# Altium PCB sd_card_module.PcbDoc
Units mm, origin at the board's own origin, x right, y up, seen from the top; angles counter-clockwise.
Board outline 23.02 x 15.02 mm, 4 copper layers (Component Side, Signal Layer 2, Signal Layer 1, Solder Side), stack 0.728 mm thick; 26 components, 39 nets, 222 pads, 58 vias.
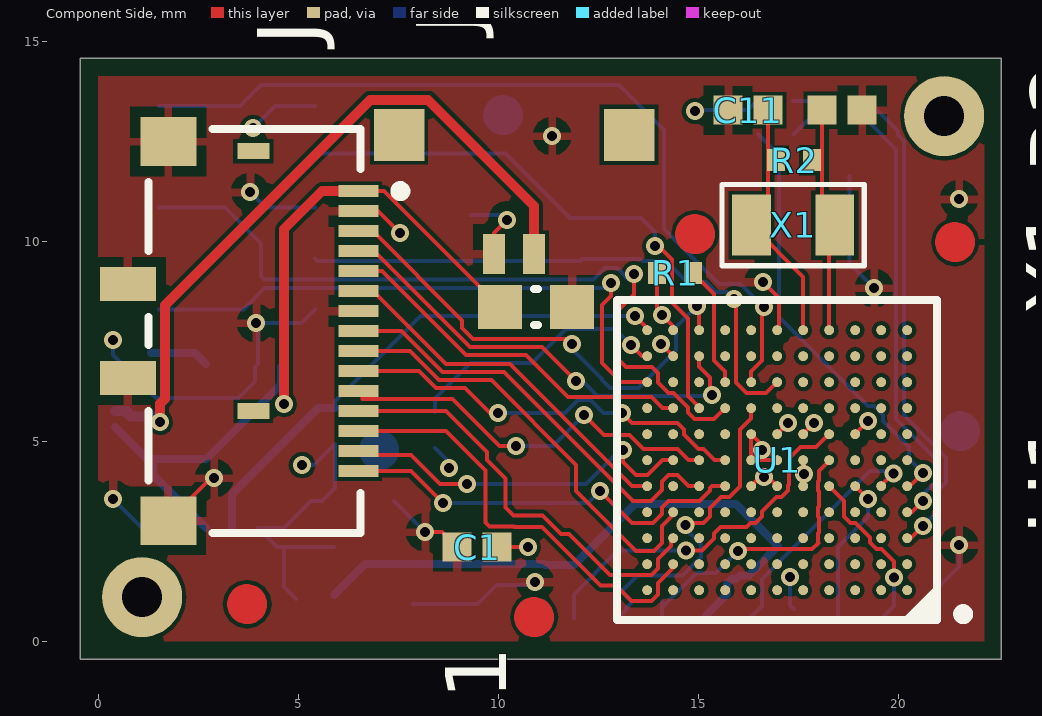
[diagram p0: Component Side view]
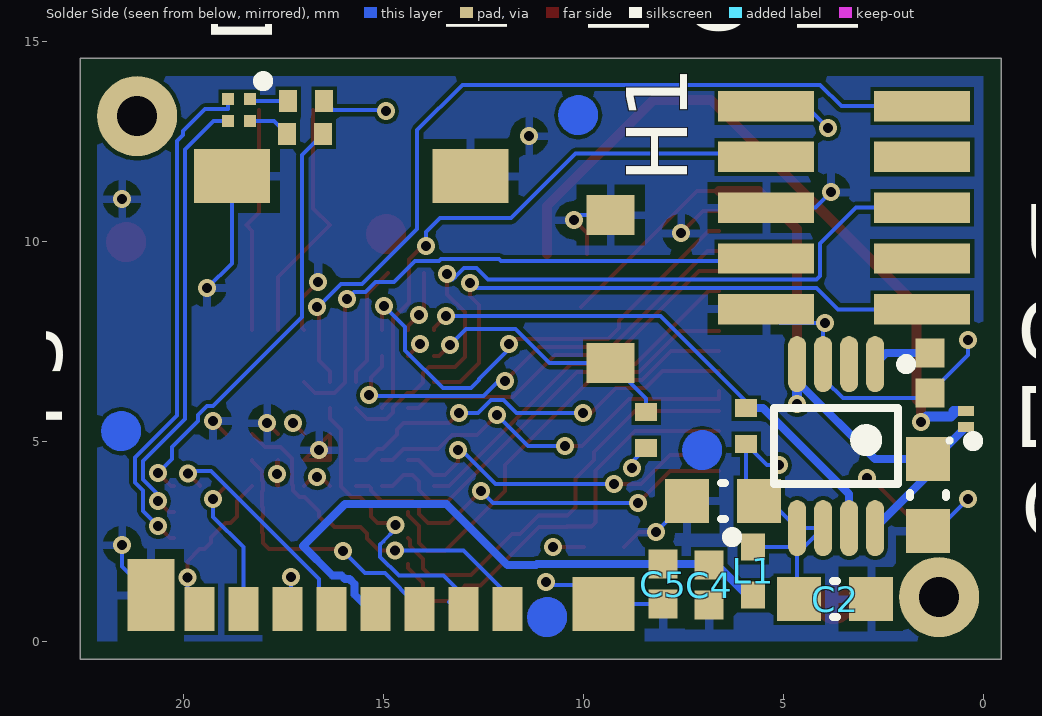
[diagram p1: Solder Side view, seen from below]
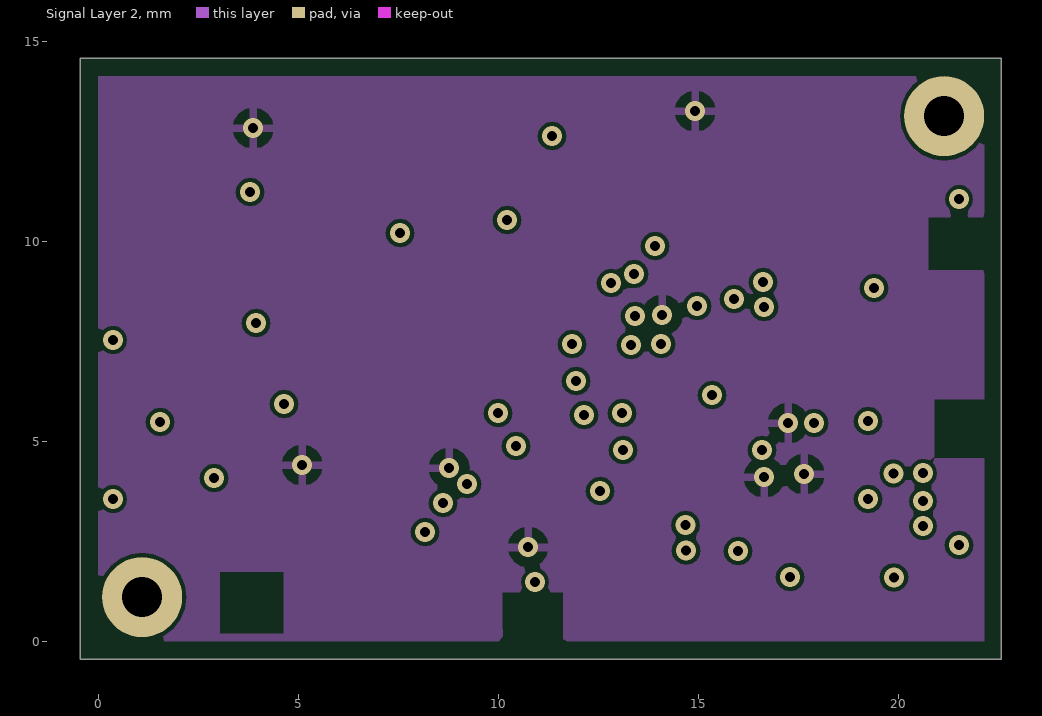
[diagram p2: Signal Layer 2]
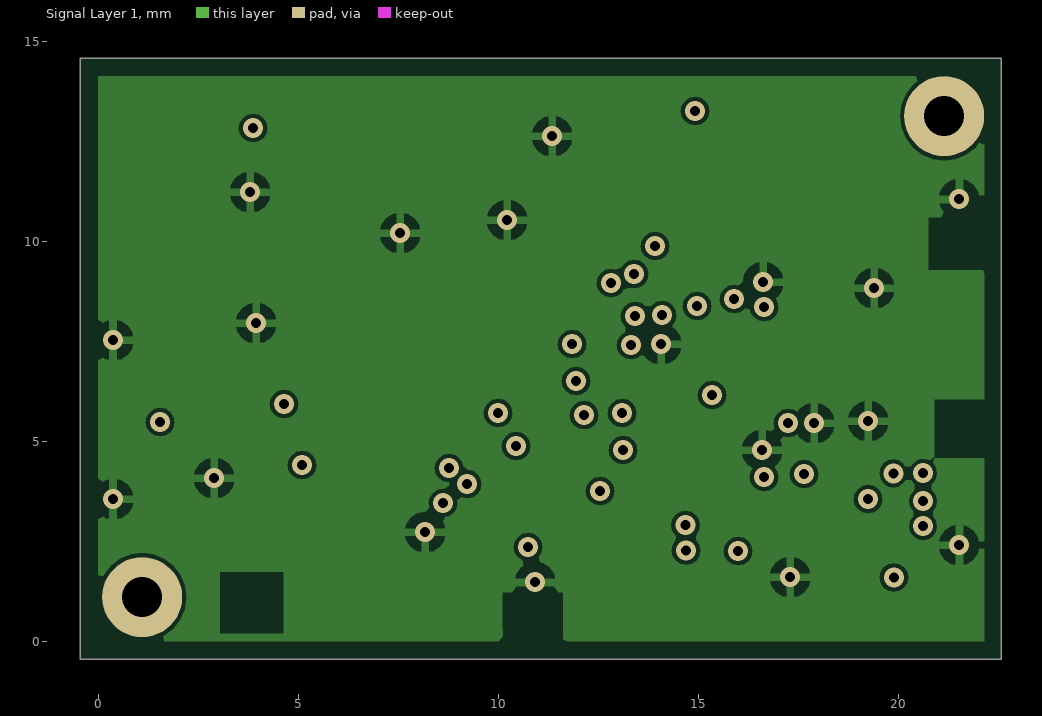
[diagram p3: Signal Layer 1]

## Layer stack, top to bottom
Top Solder: solder mask 0.0102, Solder Resist, Dk 3.5
Component Side: signal copper 0.012
Dielectric 1: core 0.28, Prepreg 7628, Dk 4.2
Signal Layer 2: signal copper 0.018
Dielectric 3: prepreg 0.36, FR4, Dk 4.2
Signal Layer 1: signal copper 0.018
Dielectric 4: core 0.028, Prepreg 7628, Dk 4.2
Solder Side: signal copper 0.012
Bottom Solder: solder mask 0.0102, Solder Resist, Dk 3.5

## Board outline
-0.45,-0.45 -0.45,14.575 22.575,14.575 22.575,-0.45

## Design rules (kind name [scope] priority, off if disabled: settings)
Clearance Clearance-xPP-xTP-xTT [All] p1: gap=0.1
ComponentClearance [All] p1: gap=0.25 collisioncheckmode=3 verticalgap=0.25 showdistances=FALSE
DiffPairsRouting [All] p1: maxlimit=0.25 minlimit=0.25 mostfreqgap=0.25 toplayer_minwidth=0.381 toplayer_maxwidth=0.381 toplayer_prefwidth=0.381 midlayer1_minwidth=0.381 midlayer1_maxwidth=0.381 midlayer1_prefwidth=0.381 midlayer2_minwidth=0.381 midlayer2_maxwidth=0.381 midlayer2_prefwidth=0.381 bottomlayer_minwidth=0.381 bottomlayer_maxwidth=0.381 bottomlayer_prefwidth=0.381 maxuncoupledlength=12.5
Height [All] p1: minheight=0 maxheight=25 prefheight=12.5
HoleSize HoleSize-PTH [All] p1: absolutevalues=TRUE maxlimit=2 minlimit=0.15 maxpercent=80.000 minpercent=20.000
HoleToHoleClearance [All] p1: gap=0.15 allowstackedmicrovias=TRUE
MinimumAnnularRing "Minimum IAR  >0.45mm" [((ObjectKind = 'Pad') OR (ObjectKind = 'Via')) And (Layer = 'MultiLayer') And (HoleDiameter > AsMM(0.45))] p1: minimumring=0.125 // minimum inner annular ring for pads > 0.45mm finished hole size
MinimumAnnularRing "Minimum IAR <0.45mm" [((ObjectKind = 'Pad') OR (ObjectKind = 'Via')) And ((Layer = 'Component Side') OR (Layer = 'Solder Side')) And (HoleDiameter < AsMM(0.45))] p2: minimumring=0.125 // minimum outer annular ring for pads < 0.45mm finished hole size
MinimumAnnularRing "Minimum IAR <0.5mm_1" [((ObjectKind = 'Pad') OR (ObjectKind = 'Via')) And ((Layer = 'Signal Layer 1') OR (Layer = 'Signal Layer 2')) And (HoleDiameter < AsMM(0.5))] p3: minimumring=0.125 // minimum inner  annular ring for pads < 0.5mm finished hole size
MinimumSolderMaskSliver [All] p1: minsoldermaskwidth=0.1
PlaneClearance PlaneClearance-IPI [All] p1: clearance=0.4
PlaneConnect [All] p1: planeconnectstyle=Relief reliefexpansion=0.4 reliefentries=4 reliefconductorwidth=0.2 reliefairgap=0.2
PolygonConnect PolygonConnect-xTW [All] p1: connectstyle=Relief reliefconductorwidth=0.2 reliefentries=4 polygonreliefangle="90 Angle" airgapwidth=0.254
RoutingCorners [All] p1: cornerstyle=45-Degree minsetback=2.5 maxsetback=2.5
RoutingVias "RoutingVias > 0.45mm" [(ObjectKind = 'Via') And (HoleDiameter > AsMM(0.45))] p1: holewidth=0.5 width=1 viastyle="Through Hole" minholewidth=0.45 minwidth=0.95 maxholewidth=0.9 maxwidth=1.4 // finishet hole size > 0.45mm
RoutingVias "RoutingVias <= 0.45mm" [(ObjectKind = 'Via') And (HoleDiameter <= AsMM(0.45))] p2: holewidth=0.25 width=0.8 viastyle="Through Hole" minholewidth=0.25 minwidth=0.45 maxholewidth=0.5 maxwidth=1 // finishet hole size <= 0.45mm
SilkToBoardRegionClearance [All] p1 off:
SilkToSilkClearance [All] p1 off: silktosilkclearance=0.2
SilkToSolderMaskClearance SilkscreenOverComponentPads [IsPad] p1 off: minsilkscreentomaskgap=0.2 clearancetoexposedcopper=TRUE
SolderMaskExpansion [All] p1: expansion=0
Width Width-xTW [All] p1: maxlimit=1.5 minlimit=0.1 preferedwidth=0.2
18 further rules are at their usual default settings.

## Classes and differential pairs
component class sd_card_module: C2 C3 C4 C5 C6 C10 C13 D1 D4 J1 J2 L1 P3 R3 R4 R5 R6 U3
component class U_K64f_XFBGA_121_pin: C1 C11 C12 H1 R1 R2 U1 X1

## Components (designator, comment, footprint, x,y, rotation, side; value= is the part's Value field where it differs from the comment)
C1 "CAP 0.1uF 10V 0402(1005)" CAPC0402(1005)60_M 9.475,2.35 r0 top
C2 "CAP 47uF 10V 0603(1608)" CAPC0603(1608)100_M 3.7,1.05 r0 bottom
C3 "CAP 10pF 10V 0402(1005)" CAPC0402(1005)60_M 1.325,6.7 r90 bottom
C4 "CAP 0.1uF 10V 0402(1005)" CAPC0402(1005)60_M 6.85,1.4 r90 bottom
C5 "CAP 1uF 10V 0402(1005)" CAPC0402(1005)60_M 8,1.425 r90 bottom
C6 "CAP 2.2uF 10V 0603(1608)" CAPC0603(1608)100_M 10.95,8.35 r180 top
C10 "CAP 2.2uF 10V 0603(1608)" CAPC0603(1608)100_M 6.5,3.5 r180 bottom
C11 "12p" CAPC0402(1005)60_M 16.25,13.275 r0 top
C12 "12p" CAPC0402(1005)60_M 18.6,13.275 r180 top
C13 "CAP 2.2uF 10V 0603(1608)" CAPC0603(1608)100_M 1.375,3.65 r90 bottom
D1 "0603 diode" DIOC0603X03N 0.425,5.55 r90 bottom
D4 "3 in 1 led APGF1011SEEPBVGC-TT" APGF1011SEEPBVGC-TT 18.325,13.55 r270 bottom
H1 "10 pin header" SAM8795-ND 5.425,13.375 r270 bottom (schematic designator H)
J1 "502244-1530" "MOLX-502244-1530 long_pins" 3.675,7.75 r270 top
J2 "2 pin header smd" "2 pin header picolock" 9.9,9.675 r0 top
L1 "MMZ1005Y800BT000" SMD-0402 5.75,1.75 r270 bottom
P3 "microsd molex 104031" "MICROSD 104031 molex" 15.05,0.25 r180 bottom
R1 "4K7 5% 0402(1005)" RESC0402(1005)_L 14.425,9.2 r0 top
R2 "1M" RESC0402(1005)_L 17.4,12.025 r0 top
R3 "470R 5% 0402(1005)" RESC0402(1005)_L 16.95,12.675 r180 bottom
R4 "330k 5% 0402(1005)" RESC0402(1005)_L 5.925,5.375 r90 bottom
R5 "270R 5% 0402(1005)" RESC0402(1005)_L 16.925,13.5 r0 bottom
R6 "10M 5% 0402(1005)" RESC0402(1005)_L 8.425,5.275 r90 bottom
U1 "MK64FN1M0VDC12" FRES-MAPBGA-121 16.975,4.525 r180 top
U3 "LP2989IMM-3.3" MUA08A_L 3.675,4.875 r270 bottom
X1 "ABS06-32.768KHz-T" 0805 17.375,10.4 r0 top

## Footprints (in the part's own frame and the unit in brackets; to place one, negate y for a bottom-side part, rotate by r counter-clockwise, add the part's x,y. Pads: shape width x height; smd on the part's side, far side on the other; paste and mask are expansions set on the pad)
"2 pin header picolock" [mm] "2 pin header picolock"
  rect 1.26x1.3 smd: Mount(-2.375,2.98) Mount(3.375,2.98)
  rect 0.55x1 smd: VDD(1,0) VSS(0,0)
  body extent -2.77,-0.39 3.83,4.8, height 1.48
0805 [mil]
  rect 38x60 smd: 1(-41,0) 2(41,0)
  silkscreen extent -70,-40 70,40
APGF1011SEEPBVGC-TT [mm] "APGF1011SEEPBVGC-TT 3 in 1 led"
  rect 0.3x0.3 smd: 1(0,0) 2(0,-0.55) 3(0.55,-0.55) 4(0.55,0)
  body extent -0.23,-0.77 0.77,0.23, height 0.2
CAPC0402(1005)60_M [mm] "Chip Capacitor, Body 1.0x0.5mm, Height 0.6mm, IPC Low Density"
  rect 0.72x0.72 smd: 1(-0.5,0) 2(0.5,0)
  body extent -0.55,-0.3 0.55,0.3, height 0.6
CAPC0603(1608)100_M [mm] "Chip Capacitor, Body 1.6x0.8mm, Height 1.0mm, IPC Low Density"
  rect 1.1x1.1 smd: 1(-0.9,0) 2(0.9,0)
  silkscreen extent -0.05,-0.45 0.05,0.45, body extent -0.87,-0.47 0.88,0.48, height 1
DIOC0603X03N [mm] "Chip Diode, 2-Leads, Body 0.60x0.30mm, IPC Medium Density"
  rect 0.25x0.4 smd: 1(-0.2,0) 2(0.2,0)
  silkscreen extent -0.59,0.36 -0.49,0.46, body extent -0.32,-0.17 0.32,0.16, height 0.32
FRES-MAPBGA-121 [mm] "MAPBGA, 121-Balls, Body 8x8mm, Pitch 0.65mm"
  round 0.25 smd: A1(-3.25,3.25) A2(-2.6,3.25) A3(-1.95,3.25) A4(-1.3,3.25) A5(-0.65,3.25) A6(0,3.25) A7(0.65,3.25) A8(1.3,3.25) A9(1.95,3.25) A10(2.6,3.25) A11(3.25,3.25) B1(-3.25,2.6) B2(-2.6,2.6) B3(-1.95,2.6) B4(-1.3,2.6) B5(-0.65,2.6) B6(0,2.6) B7(0.65,2.6) B8(1.3,2.6) B9(1.95,2.6) B10(2.6,2.6) B11(3.25,2.6) C1(-3.25,1.95) C2(-2.6,1.95) C3(-1.95,1.95) C4(-1.3,1.95) C5(-0.65,1.95) C6(0,1.95) C7(0.65,1.95) C8(1.3,1.95) C9(1.95,1.95) C10(2.6,1.95) C11(3.25,1.95) D1(-3.25,1.3) D2(-2.6,1.3) D3(-1.95,1.3) D4(-1.3,1.3) D5(-0.65,1.3) D6(0,1.3) D7(0.65,1.3) D8(1.3,1.3) D9(1.95,1.3) D10(2.6,1.3) D11(3.25,1.3) E1(-3.25,0.65) E2(-2.6,0.65) E3(-1.95,0.65) E4(-1.3,0.65) E5(-0.65,0.65) E6(0,0.65) E7(0.65,0.65) E8(1.3,0.65) E9(1.95,0.65) E10(2.6,0.65) E11(3.25,0.65) F1(-3.25,0) F2(-2.6,0) F3(-1.95,0) F4(-1.3,0) F5(-0.65,0) F6(0,0) F7(0.65,0) F8(1.3,0) F9(1.95,0) F10(2.6,0) F11(3.25,0) G1(-3.25,-0.65) G2(-2.6,-0.65) G3(-1.95,-0.65) G4(-1.3,-0.65) G5(-0.65,-0.65) G6(0,-0.65) G7(0.65,-0.65) G8(1.3,-0.65) G9(1.95,-0.65) G10(2.6,-0.65) G11(3.25,-0.65) H1(-3.25,-1.3) H2(-2.6,-1.3) H3(-1.95,-1.3) H4(-1.3,-1.3) H5(-0.65,-1.3) H6(0,-1.3) H7(0.65,-1.3) H8(1.3,-1.3) H9(1.95,-1.3) H10(2.6,-1.3) H11(3.25,-1.3) J1(-3.25,-1.95) J2(-2.6,-1.95) J3(-1.95,-1.95) J4(-1.3,-1.95) J5(-0.65,-1.95) J6(0,-1.95) J7(0.65,-1.95) J8(1.3,-1.95) J9(1.95,-1.95) J10(2.6,-1.95) J11(3.25,-1.95) K1(-3.25,-2.6) K2(-2.6,-2.6) K3(-1.95,-2.6) K4(-1.3,-2.6) K5(-0.65,-2.6) K6(0,-2.6) K7(0.65,-2.6) K8(1.3,-2.6) K9(1.95,-2.6) K10(2.6,-2.6) K11(3.25,-2.6) L1(-3.25,-3.25) L2(-2.6,-3.25) L3(-1.95,-3.25) L4(-1.3,-3.25) L5(-0.65,-3.25) L6(0,-3.25) L7(0.65,-3.25) L8(1.3,-3.25) L9(1.95,-3.25) L10(2.6,-3.25) L11(3.25,-3.25)
  silkscreen extent -4.78,-4 4,4, body extent -4,-4 4,4, height 0.5
"MICROSD 104031 molex" [mm]
  rect 0.75x1.1 smd: 1(3.155,0.55) 2(2.055,0.55) 3(0.955,0.55) 4(-0.145,0.55) 5(-1.245,0.55) 6(-2.345,0.55) 7(-3.445,0.55) 8(-4.545,0.55)
  rect 1.2x1 smd: detect1(5.74,6.7) detect2(5.74,10.4)
  rect 1.17x1.8 smd: shield(-5.755,0.9)
  rect 1.9x1.35 smd: shield(-3.73,11.375) shield(2.24,11.375)
  rect 1.55x1.35 smd: shield(5.565,0.675)
  body extent -5.95,0.35 6,11.75, height 1.44
"MOLX-502244-1530 long_pins" [mm] "FFC Connector, 15-Leads, Right Angle, Pitch 0.5 mm, Mated Height 2.33 mm, SMT"
  rect 0.3x1 smd: 1(-3.5,2.83) 2(-3,2.83) 3(-2.5,2.83) 4(-2,2.83) 5(-1.5,2.83) 6(-1,2.83) 7(-0.5,2.83) 8(0,2.83) 9(0.5,2.83) 10(1,2.83) 11(1.5,2.83) 12(2,2.83) 13(2.5,2.83) 14(3,2.83) 15(3.5,2.83)
  rect 1.22x1.4 smd: MP1(-4.74,-1.92) MP2(4.74,-1.92)
  rect 0.85x1.4 smd: MP3(-1.175,-2.93) MP4(1.175,-2.93)
  silkscreen extent -5.05,-2.42 5.05,4.01, body extent -5.05,-3.28 5.05,3.18, height 2.34
MUA08A_L [mm] "TSOP, 8-Leads, Body 3x3mm, Pitch 0.65mm, IPC High Density"
  oval 1.4x0.45 smd: 1(-2.05,0.975) 2(-2.05,0.325) 3(-2.05,-0.325) 4(-2.05,-0.975) 5(2.05,-0.975) 6(2.05,-0.325) 7(2.05,0.325) 8(2.05,0.975)
  silkscreen extent -2.17,-1.55 0.95,1.87, body extent -1.55,-1.55 1.55,1.55, height 1.09
RESC0402(1005)_L [mm] "Chip Resistor, Body 1.0x0.5mm, IPC High Density"
  rect 0.45x0.55 smd: 1(-0.45,0) 2(0.45,0)
  body extent -0.52,-0.27 0.53,0.28, height 0.4
SAM8795-ND [mm] "10 pin programming header 1.27mm"
  rect 0.76x2.4 smd: 1(0,0) 2(1.27,0) 3(2.54,0) 4(3.81,0) 5(5.08,0) 6(0,3.9) 7(1.27,3.9) 8(2.54,3.9) 9(3.81,3.9) 10(5.08,3.9)
SMD-0402 [mm] "Chip Inductor, 2-Leads, Body 1.0x0.5mm"
  rect 0.675x0.6 smd: 1(-0.6,0) 2(0.6,0)
  body extent -0.5,-0.25 0.5,0.25, height 0.49

## Part data
C1: library part CMP-1034-00013-1, "0.1uF"
C2: library part CMP-1035-00147-1, "CAP 47uF 10V ±0.1pF 0603 (1608 Metric) Thickness 1mm SMD"
C3: library part CMP-1034-00013-1, "CAP 10pF 10V ±0.1pF 0402 (1005 Metric) Thickness 0.6mm SMD"
C4: library part CMP-1034-00013-1, "CAP 0.5pF 10V ±0.1uF 0402 (1005 Metric) Thickness 0.6mm SMD"
C5: library part CMP-1034-00013-1, "CAP 1uF 10V ±1uF 0402 (1005 Metric) Thickness 0.6mm SMD"
C6 C10 C13: library part CMP-1035-00147-1, "CAP 2.2uF 10V ±0.1pF 0603 (1608 Metric) Thickness 1mm SMD"
C11 C12: library part CMP-1034-00013-1, "CAP 12pF 10V ±0.1pF 0402 (1005 Metric) Thickness 0.6mm SMD"
H1: library part SAM8795-ND, "10 pin programming header SAM8795-ND"
J1: library part MOLX-502244-1530
L1: library part CMP-0220-00098-1, "EMI Filter Beads, Chips & Arrays 0402 80ohms 250mA HiSpd Signal Line"
R1: library part CMP-1011-00090-1, "4K7 0.063W 5% 0402 (1005 Metric)  SMD"
R2: library part CMP-1011-00090-1, "1M 0.063W 5% 0402 (1005 Metric)  SMD"
R3: library part CMP-1011-00090-1, "470R 5% 0402 (1005 Metric)  SMD"
R4: library part CMP-1011-00090-1, "330k 0.063W 5% 0402 (1005 Metric)  SMD"
R5: library part CMP-1011-00090-1, "270R W 5% 0402 (1005 Metric)  SMD"
R6: library part CMP-1011-00090-1, "10M 0.063W 5% 0402 (1005 Metric)  SMD"
U1: library part CMP-0182-00050-2, "Cortex-M4-based Microcontroller with FPU, 1 MB, 120 MHz, 1.71 to 3.6 V, -40 to 105 degC, 121-Ball MAPBGA, RoHS, Tray"
U3: library part CMP-0062-02283-2, "Micropower/Low Noise, 500 mA Ultra Low-Dropout Regulator, 8-pin Mini SOIC"
X1: library part CMP-0463-00001-2, "Crystals 32.768KHz 20ppm 12.5pF -40C +85C 0805(2012)"

## Free pads (board coordinates)
  rect 0.8x0.4 smd: 0(3.88,5.75) 0(3.88,12.25)
  round 2 hole 1 unplated paste+0 mask+0: Mount(1.1,1.1) Mount(21.15,13.125)

## Via types
v1: diameter 0.45/0.5/0.5/0.45 (per signal layer), hole 0.25, Component Side to Solder Side, tented both sides, 58 vias

## Nets (pads, with @x,y where several pads share a name; then routed paths per layer and width w, separated by ;. In a path a pad name is that pad's centre, name@x,y a point inside that pad or via, vN(x,y) a via of type N, cw(c..) or ccw(c..) an arc to the next point about the centre after c; other vN are vias at no path point)
CD_DETECT: P3.detect1 R6.2 U1.K11 | length 6.6
  Component Side w0.1: v1(13.325,7.4) 13.6,7.125 U1.K11
  Solder Side w0.1: R6.2 8.425,6.065 P3.detect1 10.845,6.95 11.695,7.8 12.925,7.8 v1(13.325,7.4)
CS_AS_M: J1.4 U1.K9 | length 11.4
  Component Side w0.1: J1.4@6.605,9.75 6.892,9.75 9.292,7.35 11.1,7.35 v1(11.95,6.5) ; U1.K9 15.025,6.864 15.3,6.589 v1@15.3,6.125
  Solder Side w0.1: v1(11.95,6.5) 12.113,6.5 12.488,6.125 15.325,6.125 v1(15.35,6.15)
CS_AS_S: J1.9 U1.D10 | length 10.9
  Component Side w0.1: J1.9@6.605,7.25 7.801,7.25 8.526,6.525 9.833,6.525 11.95,4.408 11.95,3.75 13.45,2.25 13.9,2.25 14.1,2.45 14.1,2.875 14.375,3.15 U1.D10
DAT0: P3.7 U1.E3 | length 3.7
  Component Side w0.1: U1.E3 v1(19.251,3.55)
  Solder Side w0.1: P3.7@18.495,0.575 18.495,2.35 19.251,3.106 v1(19.251,3.55)
DAT1: P3.8 U1.E4 | length 4.2
  Component Side w0.1: U1.E4 18.65,3.5 18.65,3.111 18.811,2.95 18.939,2.95 19.3,2.589 19.3,2.461 19.461,2.3 19.589,2.3 19.893,1.996 v1(19.893,1.593)
  Solder Side w0.1: P3.8@19.595,0.575 19.893,0.873 v1(19.893,1.593)
EXT_3V7: C6.2 C13.2 D1.1 J1.1 U3.4 U3.8 | length 20.4
  Component Side w0.1: J1.1@6.605,11.25 7.15,11.25 C6.2
  Component Side w0.25: v1(4.65,5.925) 4.65,10.3 5.6,11.25 J1.1@6.605,11.25
  Solder Side w0.2: D1.1 1.225,4.55 C13.2 ; U3.8 1.375,4.15 C13.2 ; U3.4 4.575,6.85 4.575,6.424 2.701,4.55 C13.2
  Solder Side w0.25: v1(4.65,5.925) U3.4
GND: C1.1 C2.1 C3.1 C4.1 C5.1 C6.1 C10.1 C11.1 C12.1 C13.1 H1.3 H1.5 J1.2 J1.7 J1.MP1 J1.MP2 J1.MP3 J1.MP4 J2.VSS P3.6 P3.detect2 P3.shield U1.F6 U1.F7 U1.G3 U1.G5 U1.G7 U1.K10 U1.L6 U3.3 | length 31.7
  Component Side w0.1: J1.MP2 2.82,4.075 v1(2.9,4.075) ; J1.2@6.605,10.75 7,10.75 v1(7.55,10.2) ; v1(8.175,2.725) 8.6,2.725 C1.1 ; J2.VSS 9.9,10.2 v1(10.225,10.525) ; v1(14.075,7.425) U1.K10 ; v1(16.625,8.975) 17.025,8.575 17.025,7.825 U1.L6 ; U1.G5 v1(17.9,5.45) ; U1.G3 v1(19.25,5.5) ; U1.F7 U1.F6 16.725,4.775 v1(16.6,4.775) ; U1.F7 U1.G7 16.6,4.9 v1(16.6,4.775) ; U1.F7 16.575,4.775 v1(16.6,4.775)
  Solder Side w0.1: v1(0.375,3.55) 1.175,2.75 C13.1 ; v1(0.375,7.525) 0.375,7.15 C3.1 1.45,6.075 3.505,6.075 3.925,6.495 3.925,6.85 U3.3 4,7.9 v1(3.95,7.95) 5.08,7.95 H1.5 ; v1(3.8,11.225) 4.19,10.835 H1.3 ; C10.1 v1(8.175,2.725) ; C5.1@7.875,0.925 C5.1 9.485,0.925 9.96,1.4 10.975,1.4 10.926,1.449 v1(10.926,1.475) ; P3.detect2 10.1,10.65 v1(10.225,10.525) ; v1(17.3,1.6) 17.3,0.895 P3.6 ; P3.shield@18.78,11.625 18.78,9.445 v1(19.4,8.825) ; P3.shield@20.805,1.15 21.525,1.87 v1(21.525,2.4)
  other v1: 21.525,11.05 11.35,12.625
GPIO1: J1.14 U1.F10 | length 9.1
  Component Side w0.1: J1.14@6.605,4.75 6.705,4.65 7.825,4.65 8.55,3.925 v1(9.225,3.925) ; v1(13.125,4.775) 13.125,4.475 13.45,4.15 13.739,4.15 14.114,4.525 U1.F10
  Solder Side w0.1: v1(9.225,3.925) 12.195,3.925 13.045,4.775 v1(13.125,4.775)
GPIO2: J1.10 U1.F8 | length 10.3
  Component Side w0.1: J1.10@6.605,6.75 8.019,6.75 8.444,6.325 9.175,6.325 9.8,5.7 v1(10,5.7) ; v1(13.1,5.7) 13.35,5.45 14.489,5.45 14.65,5.289 14.65,5.161 15.011,4.8 15.139,4.8 15.414,4.525 U1.F8
  Solder Side w0.1: v1(10,5.7) 11.67,5.7 11.995,6.025 12.305,6.025 12.63,5.7 v1(13.1,5.7)
GPIO3: J1.11 U1.F9 | length 9.9
  Component Side w0.1: J1.11@6.605,6.25 6.605,6.05 8.858,6.05 10.033,4.875 v1(10.45,4.875) ; v1(12.15,5.65) 12.65,5.15 13.28,5.15 13.63,4.8 14.489,4.8 14.764,4.525 U1.F9
  Solder Side w0.1: v1(10.45,4.875) 11.375,4.875 v1(12.15,5.65)
GPIO4: J1.15 U1.E8 | length 10.4
  Component Side w0.1: J1.15@6.605,4.25 7.825,4.25 v1(8.625,3.45) ; v1(12.55,3.75) 13.35,2.95 13.875,2.95 14.1,3.175 14.1,3.339 14.261,3.5 15.039,3.5 15.3,3.761 15.3,3.825 15.35,3.875 U1.E8
  Solder Side w0.1: v1(8.625,3.45) 12.25,3.45 v1(12.55,3.75)
GPIO5: J1.6 U1.E11 | length 9.1
  Component Side w0.1: J1.6@6.605,8.75 6.867,8.75 8.692,6.925 10.3,6.925 13.35,3.875 U1.E11
LED_BLUE: D4.3 U1.D1 | length 11.3
  Component Side w0.1: U1.D1 20.35,3.225 v1(20.625,3.5)
  Solder Side w0.1: D4.3 19.242,13 19.95,12.292 19.95,5.558 21,4.508 21,4.045 20.625,3.67 v1(20.625,3.5)
LED_GREEN: D4.2 U1.C1 | length 12.7
  Component Side w0.1: U1.C1 20.325,2.575 v1(20.625,2.875)
  Solder Side w0.1: D4.2 18.875,13.3 19.45,13.3 20,12.75 20,12.649 20.15,12.499 20.15,5.641 21.2,4.591 21.2,3.962 21,3.762 21,3.25 v1(20.625,2.875)
LED_RED: R3.2 U1.E1 | length 10.8
  Component Side w0.1: U1.E1 20.3,3.875 v1(20.625,4.2)
  Solder Side w0.1: R3.2 17.025,12.15 17.025,8.1 19.25,5.875 19.405,5.875 19.625,5.655 19.625,5.5 20.275,4.85 20.275,4.55 v1(20.625,4.2)
LVD: R4.2 U1.L11 U3.7 | length 13.3
  Component Side w0.1: v1(13.425,8.125) 13.725,7.825 U1.L11
  Solder Side w0.1: R4.2 5.925,5.987 8.063,8.125 v1(13.425,8.125)
  Solder Side w0.2: U3.7 3.35,3.675 5.5,5.825 R4.2
MISO_AS_S: J1.13 U1.B10 | length 10.9
  Component Side w0.1: J1.13@6.605,5.25 8.7,5.25 9.687,4.263 9.687,2.963 9.79,2.86 10.397,2.86 10.407,2.85 11.1,2.85 12.565,1.385 12.947,1.385 13.332,1 13.839,1 14,1.161 14,1.45 14.375,1.825 U1.B10
MOSI_AS_M: J1.5 U1.H10 | length 9.2
  Component Side w0.1: J1.5@6.605,9.25 7.1,9.25 9.2,7.15 10.7,7.15 11.75,6.1 13.839,6.1 14.114,5.825 U1.H10
MOSI_AS_S: J1.8 U1.E9 | length 10.7
  Component Side w0.1: J1.8@6.605,7.75 7.584,7.75 8.609,6.725 9.75,6.725 10.15,6.725 13.375,3.5 13.825,3.5 14.1,3.775 14.1,3.989 14.261,4.15 14.489,4.15 14.764,3.875 U1.E9
NetC3_2: C3.2 U3.1 | length 1.5
  Solder Side w0.2: C3.2 2.425,7.2 U3.1
NetC4_2: C4.2 C5.2 L1.2 P3.4 | length 15.2
  Solder Side w0.2: L1.2@5.9,1.15 6.675,1.925 11.151,1.925 11.176,1.9 11.895,1.9 13.42,3.425 15.95,3.425 17,2.375 16.27,1.645 16.045,1.645 15.95,1.55 15.837,1.55 15.72,1.433 15.72,1.17 15.195,0.645 P3.4@15.195,0.575
NetC11_2: C11.2 R2.1 U1.L5 X1.1 | length 6.2
  Component Side w0.1: C11.2 16.75,10.816 X1.1 17.625,9.109 U1.L5
NetC12_2: C12.2 R2.2 U1.L4 X1.2 | length 5.7
  Component Side w0.1: C12.2 18.1,10.716 X1.2 18.275,10.259 U1.L4
NetD1_2: D1.2 J2.VDD | length 17.9
  Component Side w0.25: v1(1.55,5.475) 1.55,5.937 1.67,6.057 1.67,8.398 6.802,13.53 8.248,13.53 10.9,10.878 J2.VDD
  Solder Side w0.25: D1.2 0.74,5.75 0.74,5.678 0.803,5.615 1.41,5.615 v1(1.55,5.475)
NetD4_1: D4.1 R5.2 | length 1
  Solder Side w0.1: R5.2 18.275,13.5 D4.1
NetD4_4: D4.4 R3.1 | length 1.1
  Solder Side w0.1: R3.1 17.725,13 D4.4
NetR1_2: R1.2 U1.J8 | length 3.1
  Component Side w0.1: R1.2 15.4,8.675 15.4,7.011 15.675,6.736 U1.J8
NRESET: H1.10 U1.J11 | length 15
  Component Side w0.1: v1(12.825,8.95) 12.825,8.625 12.6,8.4 12.6,6.95 13.075,6.475 U1.J11
  Solder Side w0.1: H1.10 3.633,8.295 4.163,8.825 6.687,8.825 12.7,8.825 v1(12.825,8.95)
SCK_AS_M: J1.3 U1.L9 | length 11.9
  Component Side w0.1: J1.3@6.605,10.25 6.867,10.25 9.1,8.017 9.1,7.825 9.375,7.55 11.825,7.55 11.85,7.525 v1(11.85,7.425) ; U1.L9 v1@15.025,8.25
  Solder Side w0.1: v1(11.85,7.425) 11.85,7.3 12.6,6.55 12.6,6.525 12.8,6.325 13.505,6.325 14.45,7.27 14.45,7.85 v1(14.975,8.375)
SCK_AS_S: J1.12 U1.C10 | length 10.6
  Component Side w0.1: J1.12@6.605,5.75 8.7,5.75 9.725,4.725 9.725,4.525 10.188,4.062 10.188,3.337 10.388,3.137 11.112,3.137 11.575,2.675 11.775,2.675 12.8,1.65 13.839,1.65 14,1.811 14,2.055 14.325,2.38 14.325,2.525 U1.C10
"SDHC0 D2": P3.1 U1.G4 | length 9.3
  Component Side w0.1: v1(14.7,2.264) 15.103,2.264 15.4,2.561 15.4,2.689 15.561,2.85 16.211,2.85 16.311,2.95 16.439,2.95 16.6,3.111 16.6,3.239 16.961,3.6 17.089,3.6 17.25,3.761 17.25,3.889 17.275,3.914 17.275,4.564 17.561,4.85 17.95,4.85 U1.G4
  Solder Side w0.1: P3.1@11.895,0.575 11.895,1.17 12.987,2.262 v1@14.737,2.262
"SDHC0 D3": P3.2 U1.H7 | length 8.2
  Component Side w0.1: v1(14.686,2.9) 14.85,2.9 14.9,2.95 15.139,2.95 15.3,3.111 15.3,3.325 15.575,3.6 15.789,3.6 16.05,3.861 16.05,5.289 16.325,5.564 U1.H7
  Solder Side w0.1: P3.2@12.995,0.575 13.225,0.805 13.2,0.83 13.35,0.98 13.09,1.24 13.488,1.637 14.604,1.637 15.075,2.108 15.075,2.419 14.997,2.497 14.686,2.808 v1(14.686,2.9)
"SDHC CMD": P3.3 U1.F4 | length 7.4
  Component Side w0.1: v1(16,2.25) 16.05,2.3 17.85,2.3 18.006,2.456 18,2.461 18,2.689 18.025,2.714 18.025,3.086 18,3.111 18,3.339 18.025,3.364 18.025,3.736 18,3.761 18,3.989 18.025,4.014 18.025,4.253 18.275,4.503 U1.F4
  Solder Side w0.1: P3.3@14.095,0.575 14.095,0.994 P3.3@14.174,0.916 ; P3.3 14.095,0.837 P3.3@14.174,0.916 ; v1(16,2.25) 15.45,1.7 14.958,1.7 P3.3@14.174,0.916
"SDHC DCLK": P3.5 U1.E2 | length 5.9
  Component Side w0.1: U1.E2 19.575,3.889 v1(19.881,4.194)
  Solder Side w0.1: P3.5@16.295,0.575 16.6,0.88 16.6,1.55 19.3,4.25 v1@19.881,4.25
SWCLK: H1.4 U1.J6 | length 14.3
  Component Side w0.1: v1(15.9,8.55) 15.95,8.5 15.95,6.461 16.211,6.2 16.7,6.2 U1.J6
  Solder Side w0.1: H1.4 5.49,9.5 12.05,9.5 12.1,9.55 13.555,9.55 13.605,9.5 14.2,9.5 14.725,8.975 15.192,8.975 15.442,8.725 15.725,8.725 v1(15.9,8.55)
SWDIO: H1.2 U1.H9 | length 14.3
  Component Side w0.1: v1(13.925,9.875) 14.012,9.875 14.35,9.537 14.35,8.47 14.75,8.07 14.75,6.125 15.025,5.85 U1.H9
  Solder Side w0.1: H1.2 5.425,12.188 10.185,12.188 11.798,10.575 13.575,10.575 13.925,10.225 v1(13.925,9.875)
SWO: H1.6 U1.J7 | length 21
  Component Side w0.1: U1.J7 16.325,6.736 16.6,7.011 v1@16.6,8.225
  Solder Side w0.1: H1.6 3.545,13.375 4.075,13.905 13.02,13.905 14.15,12.775 14.15,10.3 15.525,8.925 16.055,8.925 16.63,8.35 v1(16.65,8.35)
TDI: H1.8 U1.H8 | length 19.4
  Component Side w0.1: v1(13.4,9.175) 13.4,8.67 12.98,8.25 12.975,8.25 12.95,8.225 12.95,7.1 13.2,6.85 13.85,6.85 14,6.7 14,6.461 14.261,6.2 14.389,6.2 14.75,5.839 14.75,5.711 14.911,5.55 15.4,5.55 U1.H8
  Solder Side w0.1: H1.8 3.176,10.835 4.075,9.936 4.075,9.123 4.163,9.035 12.38,9.035 12.67,9.325 12.98,9.325 13.2,9.105 13.2,9.095 13.26,9.035 v1(13.4,9.175)
V3.3: C1.2 C2.2 C10.2 H1.1 L1.1 R1.1 R4.1 R5.1 R6.1 U1.E5 U1.E6 U1.E7 U1.F5 U1.G6 U1.L10 U3.5 U3.6 | length 17
  Component Side w0.1: v1(8.775,4.325) v1@8.775,4.425 ; C1.2 v1(10.75,2.35) ; R1.1 13.975,8.275 v1(14.1,8.15) 14.375,7.875 U1.L10 ; U1.E7 16.55,4.1 v1(16.65,4.1) 16.75,4.1 U1.E6 ; U1.G6 v1(17.25,5.45) ; U1.E5 U1.F5 17.65,4.5 v1(17.65,4.175) 17.65,3.9 U1.E5
  Solder Side w0.1: v1(3.875,12.825) 4.425,13.375 H1.1 ; C2.2@4.95,1.05 4.65,1.35 U3.5@4.65,2.35 ; v1(5.1,4.4) 5.4,4.4 R4.1 5.925,3.825 C10.2 5.325,3.5 U3.5 U3.6 4.475,2.35 U3.5@4.65,2.35 ; L1.1@5.9,2.35 U3.5@4.65,2.35 ; R6.1 8.775,4.475 v1(8.775,4.325) ; v1@15.05,13.275 16.25,13.275 R5.1
  other v1: 14.925,13.25
pads on no net: H1.7 H1.9 J2.Mount U1.A1 U1.A2 U1.A3 U1.A4 U1.A5 U1.A6 U1.A7 U1.A8 U1.A9 U1.A10 U1.A11 U1.B1 U1.B2 U1.B3 U1.B4 U1.B5 U1.B6 U1.B7 U1.B8 U1.B9 U1.B11 U1.C2 U1.C3 U1.C4 U1.C5 U1.C6 U1.C7 U1.C8 U1.C9 U1.C11 U1.D2 U1.D3 U1.D4 U1.D5 U1.D6 U1.D7 U1.D8 U1.D9 U1.D11 U1.E10 U1.F1 U1.F2 U1.F3 U1.F11 U1.G1 U1.G2 U1.G8 U1.G9 U1.G10 U1.G11 U1.H1 U1.H2 U1.H3 U1.H4 U1.H5 U1.H6 U1.H11 U1.J1 U1.J2 U1.J3 U1.J4 U1.J5 U1.J9 U1.J10 U1.K1 U1.K2 U1.K3 U1.K4 U1.K5 U1.K6 U1.K7 U1.K8 U1.L1 U1.L2 U1.L3 U1.L7 U1.L8 U3.2
copper on no net: | length 12.6
  Component Side w0.5: 3.975,0.925 ccw(c3.725,0.925) 3.975,0.925 ; 11.15,0.6 ccw(c10.9,0.6) 11.15,0.6 ; 15.175,10.175 ccw(c14.925,10.175) 15.175,10.175 ; 21.675,9.975 ccw(c21.425,9.975) 21.675,9.975
  Solder Side w0.5: 7.275,4.775 ccw(c7.025,4.775) 7.275,4.775 ; 10.375,13.15 ccw(c10.125,13.15) 10.375,13.15 ; 11.15,0.6 ccw(c10.9,0.6) 11.15,0.6 ; 21.8,5.25 ccw(c21.55,5.25) 21.8,5.25

## Polygon pours and split planes (outlines as drawn)
GND on Component Side "GND_L01_P000" (solid, pour order 0): 0,0 0,14.125 22.15,14.125 22.15,0
V3.3 on Signal Layer 2 "V3.3_L02_P001" (solid, pour order 1): 0,0 0,14.125 22.15,14.125 22.15,0
GND on Signal Layer 1 "GND_L03_P002" (solid, pour order 2): 0,0 0,14.125 22.15,14.125 22.15,0
GND on Solder Side "GND_L04_P003" (solid, pour order 3): 0,0 0,14.125 22.15,14.125 22.15,0

## Other copper
Signal Layer 2:
  pour cut-out: 20.75,9.275 20.75,10.6 22.125,10.6 22.125,9.275
  pour cut-out: 20.9,6.05 20.9,4.575 22.175,4.575 22.175,6.05
  pour cut-out: 3.05,1.725 3.05,0.2 4.625,0.2 4.625,1.725
  pour cut-out: 10.125,0.05 11.625,0.05 11.625,1.225 10.1,1.225 10.1,0.5
Signal Layer 1:
  pour cut-out: 10.125,0.05 11.625,0.05 11.625,1.225 10.1,1.225 10.1,0.5
  pour cut-out: 3.05,1.725 3.05,0.2 4.625,0.2 4.625,1.725
  pour cut-out: 20.9,6.05 20.9,4.575 22.175,4.575 22.175,6.05
  pour cut-out: 20.75,9.275 20.75,10.6 22.125,10.6 22.125,9.275

## Silkscreen, mask and mechanical layers (free items; w line width, h text height)
Bottom Overlay:
  circle w0.39: c0.25,5 r0.056
  circle w0.39: c6.275,2.6 r0.056
  circle w0.39: c18,14 r0.056
Mechanical 1:
  lines w0.254: 0,-0.279 0,0.229 ; 1.524,-0.533 0,-0.025 ; 1.524,0.483 0,-0.025 ; 4.677,-0.025 0,-0.025 ; 17.423,-0.025 22.1,-0.025 ; 18.484,-1.546 19,-0.025 ; 18.575,15.602 19.075,14.075 ; 18.746,-0.024 19.254,-0.026 ; 18.821,14.076 19.329,14.074 ; 18.986,-2.565 19,-0.025 ; 19.089,16.615 19.075,14.075 ; 19.5,-1.552 19,-0.025 ; 19.591,15.596 19.075,14.075 ; 20.576,-0.533 22.1,-0.025 ; 20.576,0.483 22.1,-0.025 ; 22.1,-0.279 22.1,0.229
  text "14.1 (mm)" at 22.662,1.013 h1.52 r89.7
  text "22.1 (mm)" at 4.931,-0.939 h1.52